# Altium PCB PCB.PcbDoc
Units mm, origin at the board's own origin, x right, y up, seen from the top; angles counter-clockwise.
Board outline 93.98 x 24.13 mm, 2 copper layers (Component Side, Bottom Layer), stack 0.325 mm thick; 70 components, 72 nets, 298 pads, 62 vias.
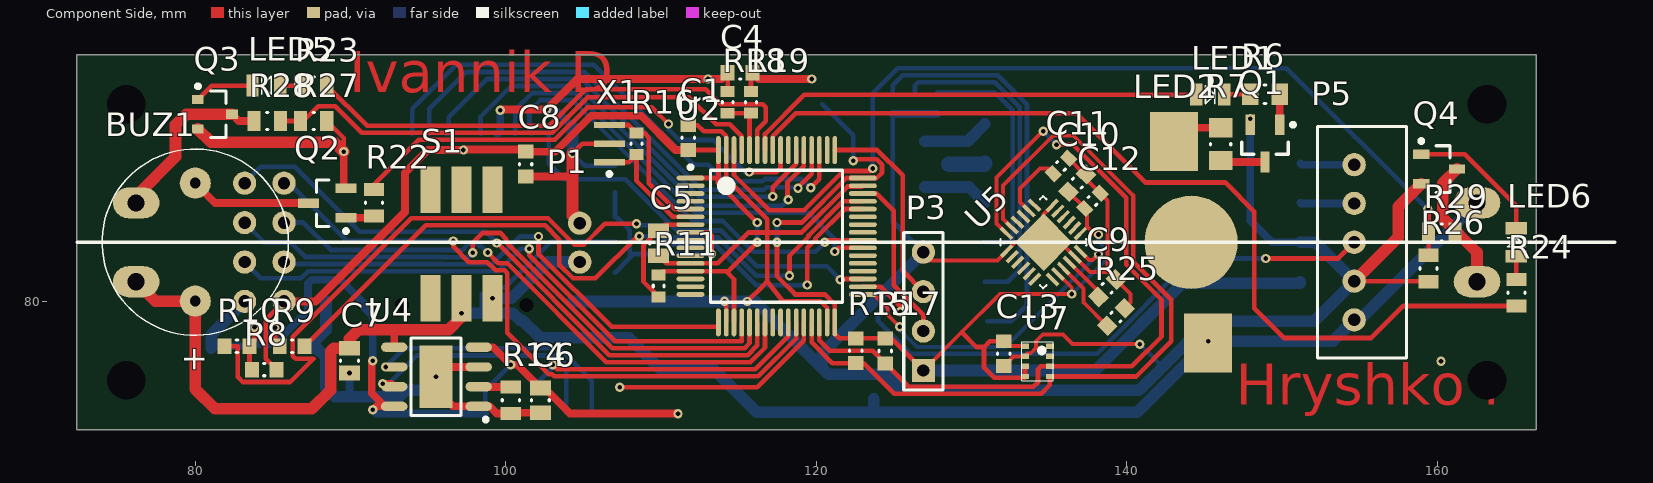
[diagram p0: Component Side view]
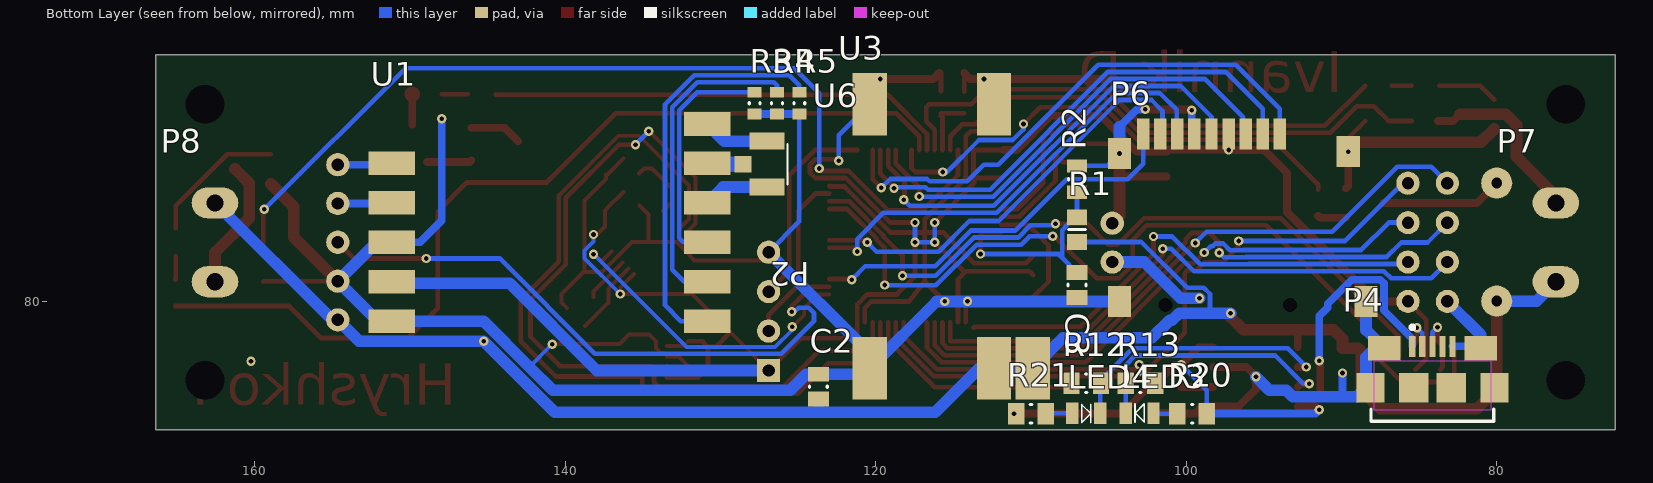
[diagram p1: Bottom Layer view, seen from below]

## Layer stack, top to bottom
Top Solder: solder mask 0.0102, Solder Resist, Dk 3.5
Component Side: signal copper 0.0356
Dielectric 1: core 0.254, FR-4, Dk 4.2
Bottom Layer: signal copper 0.0356
Solder Side: solder mask 0.0102, Solder Resist, Dk 3.5

## Board outline
72.39,71.755 72.39,95.885 166.37,95.885 166.37,71.755

## Design rules (kind name [scope] priority, off if disabled: settings)
Clearance [All] p1: gap=0.152 ignorepadtopadclearanceinfootprint=TRUE
ComponentClearance "under nrf24" [InComponent('P1') Or InComponent('U3') vs InComponent('U6')] p1: gap=0.254 collisioncheckmode=3 verticalgap=-999 showdistances=FALSE
ComponentClearance buzzer [InComponent('BUZ1') vs InComponent('U6') Or InComponent('P7')] p2: gap=0.254 collisioncheckmode=3 verticalgap=-999 showdistances=FALSE
ComponentClearance [All] p3: gap=0.5 collisioncheckmode=3 verticalgap=0 showdistances=TRUE
HoleSize [All] p1: absolutevalues=TRUE maxlimit=3 minlimit=0.3 maxpercent=80.000 minpercent=20.000
MinimumAnnularRing [All] p1: minimumring=0.076
MinimumSolderMaskSliver [All] p1 off: minsoldermaskwidth=0.254
PolygonConnect [All] p1: connectstyle=Relief reliefconductorwidth=0.254 reliefentries=4 polygonreliefangle="90 Angle" airgapwidth=0.254
RoutingVias [All] p1: holewidth=0.3 width=0.6 viastyle="Through Hole" minholewidth=0.3 minwidth=0.6 maxholewidth=0.6 maxwidth=1.27
ShortCircuit [All] p1: allowed=TRUE
SilkToSilkClearance [All] p1 off: silktosilkclearance=0.254
SilkToSolderMaskClearance [IsPad] p1 off: minsilkscreentomaskgap=0.254 clearancetoexposedcopper=TRUE
SolderMaskExpansion [All] p1: expansion=0.102
Width [All] p1: maxlimit=2 minlimit=0.254 preferedwidth=0.3
24 further rules are at their usual default settings.

## Components (designator, comment, footprint, x,y, rotation, side; value= is the part's Value field where it differs from the comment)
BUZ1 "Buzzer" BUZ12X7,6MM 80.01,87.67 r270 top locked
C1 "100nF" CAPC0603(1608)100_N 111.75,90.562 r270 top
C2 "10uF" CAPC0805(2012)100_L 123.705,74.523 r270 bottom value=200pF
C3 "100pF" CAPC0805(2012)100_L 107.046,81.072 r90 bottom value=200pF
C4 "4.7uF" CAPC0603(1608)100_N 115.1,94.727 r0 top
C5 "100pF" CAPC0805(2012)100_L 109.855,83.76 r90 top value=200pF
C6 "1uF" "CAP 0805 (2012) L" 102.235,73.643 r90 top
C7 "1uF" "CAP 0805 (2012) L" 89.941,76.2 r90 top
C8 "4.7uF" CAPC0603(1608)100_N 101.28,88.855 r90 top
C9 "100nF" CAPC0603(1608)100_N 138.743,80.86 r225 top
C10 "100nF" CAPC0603(1608)100_N 136.816,87.63 r45 top
C11 "2.2nF" CAPC0603(1608)100_L 135.76,88.739 r225 top
C12 "1uF" CAPC0603(1608)100_L 137.795,86.489 r225 top value=10nF
C13 "100nF" CAPC0603(1608)100_N 132.08,76.646 r90 top
LED1 "0805 LED" "0805 LED" 145.375,93.337 r0 top
LED2 "3W LED" "3W LED red" 144.145,83.82 r90 top locked
LED3 "0805 LED" "0805 LED" 103.007,72.814 r0 bottom
LED4 "0805 LED" "0805 LED" 106.446,72.798 r180 bottom
LED5 "0805 LED" "0805 LED" 84.6,93.92 r180 top
LED6 "0805 LED" "0805 LED" 165.1,83.82 r90 top
P1 "BATT" XH-2 106.275,87.05 r90 top locked
P2 "IPX" IPX 127,88.855 r270 bottom locked
P3 "PROG" PLS-4 126.908,75.565 r90 top locked
P4 "MicroUsb connector" "MicroUsb connector" 84.15,74.443 r180 bottom locked
P5 "XH2.54-5" XH2.54-5 154.65,83.82 r90 top locked
P6 "microSD connector" "Micro SD holder + card" 102.78,90.805 r180 bottom locked
P7 "para teminal" screw-con-2 76.2,81.28 r90 bottom locked
P8 "engine terminal" screw-con-2 162.56,86.36 r270 bottom locked
Q1 "MMBT2222A" INF-SOT23_M 148.905,90.19 r270 top
Q2 "MMBT2222A" INF-SOT23_M 88.516,86.344 r180 top
Q3 "MMBT2222A" INF-SOT23_L 81.28,92.062 r0 top
Q4 "MMBT2222A" INF-SOT23_N 160.12,88.539 r0 top
R1 "39K" 6-0805_L 107.046,84.638 r270 bottom value="39000.00 Ohm"
R2 "13K" RESC0805(2012)_L 107.046,87.889 r90 bottom value="13000.00 Ohm"
R3 "jumper" "RES 0603 (1608) L" 127.8,92.782 r270 bottom
R4 "jumper" "RES 0603 (1608) L" 126.365,92.782 r270 bottom
R5 "jumper" "RES 0603 (1608) L" 124.93,92.782 r270 bottom
R6 "47R" RESC0805(2012)_N 148.905,93.357 r0 top
R7 "5.6 Ohm" RESC0805(2012)_M 146.05,90.139 r90 top
R8 "1.5k" RESC0603(1608)_N 84.45,75.623 r0 top value="4700.00 Ohm"
R9 "22" RESC0603(1608)_N 86.25,77.118 r180 top value="4700.00 Ohm"
R10 "22" RESC0603(1608)_N 82.7,77.118 r0 top value="4700.00 Ohm"
R11 "100k" "RES 0603 (1608) L" 109.855,81.007 r270 top
R12 "1k" RESC0805(2012)_N 106.446,74.743 r0 bottom value=47R
R13 "1k" RESC0805(2012)_N 102.96,74.743 r180 bottom value=47R
R14 "1.2k" "RES 0805 (2012) L" 100.33,73.643 r90 top
R15 "4K7" RESC0603(1608)_N 122.555,76.835 r90 top value="4700.00 Ohm"
R16 "1M" "RES 0603 (1608) L" 108.428,90.17 r90 top
R17 "4K7" RESC0603(1608)_N 124.455,76.82 r90 top value="4700.00 Ohm"
R18 "100k" "RES 0603 (1608) L" 114.3,92.83 r270 top
R19 "boot0_jmp" "RES 0603 (1608) L" 115.797,92.837 r270 top
R20 "1k" RESC0805(2012)_N 99.63,72.785 r180 bottom value=47R
R21 "1k" RESC0805(2012)_N 110,72.785 r0 bottom value=47R
R22 "82R" RESC0805(2012)_L 91.514,86.362 r270 top
R23 "82R" RESC0805(2012)_L 87.63,93.912 r180 top
R24 "82R" RESC0805(2012)_L 165.1,80.572 r90 top
R25 "4K7" RESC0603(1608)_N 139.309,79.005 r45 top value="4700.00 Ohm"
R26 "10K" RESC0805(2012)_L 159.445,82.132 r90 top value="10000.00 Ohm"
R27 "10K" RESC0805(2012)_L 87.63,91.63 r180 top value="10000.00 Ohm"
R28 "1K" RESC0805(2012)_L 84.65,91.63 r0 top value="10000.00 Ohm"
R29 "1K" RESC0805(2012)_L 160.295,84.455 r180 top value="10000.00 Ohm"
S1 "DPDT" "DPDT  5.8mm SMD" 95.655,80.21 r90 top locked
U1 "TX5823" TX5823 141.025,83.82 r180 bottom locked
U2 "STM32F103RCT6" STM-LQFP64_N 117.455,84.21 r0 top locked
U3 "DC-DC" "DC-DC step up down S9" 112.395,93.71 r270 bottom locked
U4 "TP4056" "SOP-8 N pad" 95.515,75.158 r180 top locked
U5 "MPU-6050" QFN-24-4MM2 134.62,83.82 r45 top
U6 "NRF24L01+" "NRF24l01 ant" 83.185,87.63 r270 bottom locked
U7 "BMP280" "LGA-8 BMP280" 134.252,76.152 r0 top
X1 "8MHz" MURA-CSTCE_G_A-3_V 106.68,90.17 r90 top

## Footprints (in the part's own frame and the unit in brackets; to place one, negate y for a bottom-side part, rotate by r counter-clockwise, add the part's x,y. Pads: shape width x height; smd on the part's side, far side on the other; paste and mask are expansions set on the pad)
"3W LED red" [mm]
  rect 3.8x3.1 smd: A(-6.5,-1.1) K(6.5,1.1)
  round 6 smd: t-pad(0,0)
  body extent -7.09,-4 7.59,4, height 5.96
6-0805_L [mm] "Chip Resistor, Body 2.0x1.2mm, IPC High Density"
  rect 1x1.3 smd: 1(-0.8,0) 2(0.8,0)
  silkscreen extent 0,-0.55 0,0.55, body extent -1.07,-0.7 1.07,0.7, height 0.7
"0805 LED" [mm] "Chip Resistor, Body 2.0x1.2mm, IPC High Density"
  rect 0.8x1.4 smd: 1(-0.894,0.008) 2(0.903,0.008)
  silkscreen extent -0.3,-0.6 0.3,0.57, body extent -1.1,-0.73 1.1,0.72, height 1.4
BUZ12X7,6MM [mm]
  round 2 hole 0.7: 1(0.04,0) 2(7.64,0)
  silkscreen extent -2.16,-6 9.84,6, body extent -2.16,-6 9.84,6, height 9.51
"CAP 0805 (2012) L" [mm] "Chip Capacitor, Body 2.0x1.2mm, Height 0.75mm, IPC High Density"
  rect 0.95x1.35 smd: 1(-0.8,0) 2(0.8,0)
  silkscreen extent -0.05,-0.57 0.05,0.57, body extent -1.05,-0.67 1.05,0.68, height 0.95
CAPC0603(1608)100_L [mm] "Chip Capacitor, Body 1.6x0.8mm, Height 1.0mm, IPC High Density"
  rect 0.7x0.9 smd: 1(-0.7,0) 2(0.7,0)
  silkscreen extent -0.05,-0.35 0.05,0.35, body extent -0.88,-0.47 0.88,0.48, height 1
CAPC0603(1608)100_N [mm] "Chip Capacitor, Body 1.6x0.8mm, Height 1.0mm, IPC Medium Density"
  rect 0.9x1 smd: 1(-0.8,0) 2(0.8,0)
  silkscreen extent -0.05,-0.4 0.05,0.4, body extent -0.88,-0.48 0.88,0.47, height 1
CAPC0805(2012)100_L [mm] "Chip Capacitor, Body 2.0x1.2mm, Height 1.0mm, IPC High Density"
  rect 0.95x1.35 smd: 1(-0.8,0) 2(0.8,0)
  silkscreen extent -0.05,-0.58 0.05,0.58, body extent -1.1,-0.72 1.1,0.72, height 1
"DC-DC step up down S9" [mm]
  rect 4x2.2 smd: 1(1,0) 2(1,-8) 3(18,-8) 4(18,0) 5(18,2.5)
  body extent 0,-10.03 19,3.97, height 4.01
"DPDT  5.8mm SMD" [mm]
  rect 3x1.3 smd: 1(0,0.5) 2(0,-1.5) 3(0,-3.5) 4(7,-3.5) 5(7,-1.5) 6(7,0.5)
  body extent -0.85,-4.35 7.85,1.35, height 10.31
INF-SOT23_L [mm] "SOT23, 3-Leads, Body 2.9x1.3 mm, Pitch 0.95 mm, IPC High Density"
  rect 0.75x0.6 smd: 1(-1.1,0.95) 2(-1.1,-0.95) 3(1.1,0)
  silkscreen extent -1.22,-1.5 0.7,1.92, body extent -0.7,-1.5 0.7,1.5, height 1.1
INF-SOT23_M [mm] "SOT23, 3-Leads, Body 2.9x1.3 mm, Pitch 0.95 mm, IPC Low Density"
  rect 1.35x0.6 smd: 1(-1.2,0.95) 2(-1.2,-0.95) 3(1.2,0)
  silkscreen extent -1.32,-1.5 0.7,1.93, body extent -0.7,-1.5 0.7,1.5, height 1.1
INF-SOT23_N [mm] "SOT23, 3-Leads, Body 2.9x1.3 mm, Pitch 0.95 mm, IPC Medium Density"
  rect 1.05x0.6 smd: 1(-1.15,0.95) 2(-1.15,-0.95) 3(1.15,0)
  silkscreen extent -1.27,-1.5 0.7,1.92, body extent -0.7,-1.5 0.7,1.5, height 1.1
IPX [mm]
  rect 1.1x2.25 smd: 1(-1.475,0) 2(1.475,0)
  rect 1.05x1.1 smd: 3(0,-1.55)
  silkscreen extent -1.3,1.3 1.3,1.3, body extent -1.5,-1.55 1.5,1.3, height 1.29
"LGA-8 BMP280" [mm]
  rect 0.5x0.35 smd paste-25.4 mask-25.4: 1(0.8,0.975) 2(0.8,0.325) 3(0.8,-0.325) 4(0.8,-0.975) 5(-0.8,-0.975) 6(-0.8,-0.325) 7(-0.8,0.325) 8(-0.8,0.975)
  silkscreen extent -1,-1.25 1,1.25, body extent -1,-1.25 1,1.25, height 1
"Micro SD holder + card" [mm]
  rect 1.5x2 smd: 0(-1.524,-10.795) 0(-1.524,-1.27) 0(13.208,-1.143) 0(14.351,-10.795)
  rect 0.8x2 smd: 1(8.8,0) 2(7.7,0) 3(6.6,0) 4(5.5,0) 5(4.4,0) 6(3.3,0) 7(2.2,0) 8(1.1,0) 9(0,0)
  round 0 hole 0.9 unplated: ""(1.45,-11.025) ""(9.45,-11.025)
  body extent -1.65,-15.03 14.66,0.18, height 1.91
"MicroUsb connector" [mm] "SMT, 5-Leads, Body 7.9x5mm, Pitch 0.65mm"
  rect 0.4x1.35 smd: 1(-1.3,2.675) 2(-0.65,2.675) 3(0,2.675) 4(0.65,2.675) 5(1.3,2.675)
  rect 2.1x1.6 smd: 6(3.1,2.55) 7(-3.1,2.55)
  rect 1.8x1.9 smd: 8(-4,0) 9(4,0)
  rect 1.9x1.9 smd: 10(1.2,0) 11(-1.2,0)
  Component Side keep-out region: -3.75,1.75 3.75,1.75 3.75,-1.45 -3.75,-1.45
  silkscreen extent -3.95,-2.15 3.95,4.02, body extent -3.9,-2.33 3.9,2.67, height 2.68
MURA-CSTCE_G_A-3_V [mm] "SMD, 3-Leads, Body 3.2x1.3mm, Pitch 1.2mm"
  rect 0.4x2 smd: 1(-1.2,0) 2(0,0) 3(1.2,0)
  silkscreen extent -2.07,-0.13 -1.83,0.12, body extent -1.6,-0.65 1.6,0.65, height 0.7
"NRF24l01 ant" [mm]
  round 1.5 hole 0.8: 1(7.62,0) 2(7.62,-2.54) 3(5.08,0) 4(5.08,-2.54) 5(2.54,0) 6(2.54,-2.54) 7(0,0) 8(0,-2.54)
  body extent -4.13,-41.13 11.83,2.13, height 4.5
PLS-4 [mm]
  rect 1.5x1.5 hole 0.8: 1(0,0)
  round 1.5 hole 0.8: 2(2.54,0) 3(5.08,0) 4(7.62,0)
  silkscreen extent -1.27,-1.27 8.89,1.27, body extent -1.27,-1.27 8.89,1.27, height 8.44
QFN-24-4MM2 [mil]
  rect 40x10 smd paste-1000 mask-1000: 1(-81.35,49.48) 2(-81.35,29.51) 3(-81.35,9.74) 4(-81.35,-11.32) 5(-81.35,-31.18) 6(-81.35,-51.05) 13(82.13,-51.05) 14(82.13,-31.18) 15(82.13,-11.32) 16(82.13,9.74) 17(82.13,29.51) 18(82.13,49.48)
  rect 10x40 smd paste-1000 mask-1000: 7(-49.87,-83.53) 8(-30,-83.53) 9(-10.14,-83.53) 10(10.92,-83.53) 11(30.69,-83.53) 12(50.66,-83.53) 19(50.66,81.95) 20(30.69,81.95) 21(10.92,81.95) 22(-10.14,81.95) 23(-30,81.95) 24(-49.87,81.95)
  rect 103x103 smd mask-1000: 18(0.79,-0.39)
  silkscreen extent -83,-83 83,83, body extent -80,-80 80,80, height 35
"RES 0603 (1608) L" [mm] "Chip Resistor, Body 1.6x0.8mm, IPC High Density"
  rect 0.7x0.9 smd: 1(-0.7,0) 2(0.7,0)
  silkscreen extent -0.05,-0.35 0.05,0.35, body extent -0.8,-0.4 0.8,0.4, height 0.45
"RES 0805 (2012) L" [mm] "Chip Resistor, Body 2.0x1.3mm, IPC High Density"
  rect 0.85x1.3 smd: 1(-0.85,0) 2(0.85,0)
  silkscreen extent -0.05,-0.55 0.05,0.55, body extent -1,-0.63 1,0.62, height 0.5
RESC0603(1608)_N [mm] "Chip Resistor, Body 1.6x0.8mm, IPC Medium Density"
  rect 0.9x1 smd: 1(-0.8,0) 2(0.8,0)
  silkscreen extent -0.05,-0.4 0.05,0.4, body extent -0.85,-0.47 0.85,0.47, height 0.6
RESC0805(2012)_L [mm] "Chip Resistor, Body 2.0x1.3mm, IPC High Density"
  rect 0.85x1.3 smd: 1(-0.85,0) 2(0.85,0)
  silkscreen extent -0.05,-0.55 0.05,0.55, body extent -1.1,-0.67 1.1,0.68, height 0.7
RESC0805(2012)_M [mm] "Chip Resistor, Body 2.0x1.3mm, IPC Low Density"
  rect 1.25x1.5 smd: 1(-1.05,0) 2(1.05,0)
  silkscreen extent -0.05,-0.65 0.05,0.65, body extent -1.1,-0.67 1.1,0.67, height 0.7
RESC0805(2012)_N [mm] "Chip Resistor, Body 2.0x1.3mm, IPC Medium Density"
  rect 1.05x1.4 smd: 1(-0.95,0) 2(0.95,0)
  silkscreen extent -0.05,-0.6 0.05,0.6, body extent -1.1,-0.67 1.1,0.68, height 0.7
screw-con-2 [mm] "2.54"
  oval 2x3 hole 1.1: 1(0,0) 2(5.08,0)
  body extent -2.46,-3.74 7.54,4.06, height 10.2
"SOP-8 N pad" [mm] "TSOP, 8-Leads, Body 4,90x3,95mm, Pitch 1,27mm, Thermal Pad 4,00x2,10mm, IPC Medium Density"
  oval 1.7x0.6 smd: 1(-2.746,1.905) 2(-2.746,0.635) 3(-2.746,-0.635) 4(-2.746,-1.905) 5(2.692,-1.905) 6(2.692,-0.635) 7(2.692,0.635) 8(2.692,1.905)
  rect 2.1x4 smd: PAD(0,0)
  silkscreen extent -3.33,-2.5 1.6,2.88, body extent -3.02,-2.51 3.02,2.51, height 1.6
STM-LQFP64_N [mm] "Thin QFP, 64-Leads, Body 10x10mm, Pitch 0.5mm, IPC Medium Density"
  oval 1.8x0.3 smd: 1(-5.55,3.75) 2(-5.55,3.25) 3(-5.55,2.75) 4(-5.55,2.25) 5(-5.55,1.75) 6(-5.55,1.25) 7(-5.55,0.75) 8(-5.55,0.25) 9(-5.55,-0.25) 10(-5.55,-0.75) 11(-5.55,-1.25) 12(-5.55,-1.75) 13(-5.55,-2.25) 14(-5.55,-2.75) 15(-5.55,-3.25) 16(-5.55,-3.75) 33(5.55,-3.75) 34(5.55,-3.25) 35(5.55,-2.75) 36(5.55,-2.25) 37(5.55,-1.75) 38(5.55,-1.25) 39(5.55,-0.75) 40(5.55,-0.25) 41(5.55,0.25) 42(5.55,0.75) 43(5.55,1.25) 44(5.55,1.75) 45(5.55,2.25) 46(5.55,2.75) 47(5.55,3.25) 48(5.55,3.75)
  oval 0.3x1.8 smd: 17(-3.75,-5.55) 18(-3.25,-5.55) 19(-2.75,-5.55) 20(-2.25,-5.55) 21(-1.75,-5.55) 22(-1.25,-5.55) 23(-0.75,-5.55) 24(-0.25,-5.55) 25(0.25,-5.55) 26(0.75,-5.55) 27(1.25,-5.55) 28(1.75,-5.55) 29(2.25,-5.55) 30(2.75,-5.55) 31(3.25,-5.55) 32(3.75,-5.55) 49(3.75,5.55) 50(3.25,5.55) 51(2.75,5.55) 52(2.25,5.55) 53(1.75,5.55) 54(1.25,5.55) 55(0.75,5.55) 56(0.25,5.55) 57(-0.25,5.55) 58(-0.75,5.55) 59(-1.25,5.55) 60(-1.75,5.55) 61(-2.25,5.55) 62(-2.75,5.55) 63(-3.25,5.55) 64(-3.75,5.55)
  silkscreen extent -5.67,-4.25 4.25,4.57, body extent -5,-5 5,5, height 1.6
TX5823 [mm] "FPV video transmitter module 200mW"
  rect 3x1.524 smd: 1(-10.16,5.08) 2(-10.16,2.54) 3(-10.16,0) 4(-10.16,-2.54) 5(-10.16,-5.08) 6(10.16,-5.08) 7(10.16,-2.54) 8(10.16,0) 9(10.16,2.54) 10(10.16,5.08) 11(10.16,7.62)
  body extent -11,-9.68 11,9.32, height 3.01
XH2.54-5 [mm]
  round 1.5 hole 0.8: 1(-5,0) 2(-2.5,0) 3(0,0) 4(2.5,0) 5(5,0)
  silkscreen extent -7.45,-3.38 7.45,2.38, body extent -7.45,-3.38 7.45,2.38, height 7
XH-2 [mm]
  round 1.5 hole 0.8: 1(-4.5,1.5) 2(-2,1.5)
  body extent -6.95,-1.87 0.45,3.88, height 7

## Part data
BUZ1: "Active buzzer 5v"
C1 C9 C10 C13: library part CMP-1035-02585-1, "CAP 100nF 16V ±20% 0603 (1608 Metric) Thickness 1mm SMD", Case-EIA=0603, Case-Metric=1608, Rated Voltage="16 V", Tolerance=A±20%, Max Thickness="1 mm", Technology=SMT
C2 C3 C5: library part CMP-1036-02260-1, "CAP 200pF 16V ±10% 0805 (2012 Metric) Thickness 1mm SMD", Case-EIA=0805, Case-Metric=2012, Rated Voltage="16 V", Tolerance=A±10%, Max Thickness="1 mm", Technology=SMT
C4 C8: library part CMP-1035-02789-1, "CAP 4.7uF 16V ±20% 0603 (1608 Metric) Thickness 1mm SMD", Case-EIA=0603, Case-Metric=1608, Rated Voltage="16 V", Tolerance=A±20%, Max Thickness="1 mm", Technology=SMT
C6 C7: library part "Cap Cer 0805 (2012)", "SMD Capacitor Ceramic", Case-EIA=0805, Case-Metric=2012, Technology=SMT, Type=Ceramic
C11: library part CMP-1035-02030-1, "CAP 2.2nF 16V ±20% 0603 (1608 Metric) Thickness 1mm SMD", Case-EIA=0603, Case-Metric=1608, Rated Voltage="16 V", Tolerance=A±20%, Max Thickness="1 mm", Technology=SMT
C12: library part CMP-1035-02312-1, "CAP 10nF 16V ±20% 0603 (1608 Metric) Thickness 1mm SMD", Case-EIA=0603, Case-Metric=1608, Rated Voltage="16 V", Tolerance=A±20%, Max Thickness="1 mm", Technology=SMT
LED1 LED3 LED4 LED5 LED6: "0805", LatestRevisionDate=08-Jul-2005, LatestRevisionNote="Mech Layer 1 removed.", PackageDescription="LED; 2 Leads", PackageReference=LED-0, Published=8-Jun-2000, Publisher="Altium Limited"
LED2: "3W or 1W led without PCB star"
P1: library part XH-2, "XH 2-pin, 2.4mm pitch", LatestRevisionDate=17-Jul-2002, LatestRevisionNote="Re-released for DXP Platform.", Publisher="Altium Limited"
P3: library part PLS-4, "Single row pins"
P6: library part microSD, "microSD holder", LatestRevisionDate=17-Jul-2002, LatestRevisionNote="Re-released for DXP Platform.", Publisher="Altium Limited"
P7 P8: library part screw-con-2, "screw con 2-pin, 5.08mm pitch", LatestRevisionDate=17-Jul-2002, LatestRevisionNote="Re-released for DXP Platform.", Publisher="Altium Limited"
Q1 Q2 Q3 Q4: library part CMP-1178-00009-1, "NPN Silicon Switching Transistor, 40 V VCEO, 600 mA IC, SOT23, Reel, Green", Manufacturer=Infineon, ComponentLink1Description="Manufacturer URL", ComponentLink1URL=http://www.infineon.com/, ComponentLink2Description=Datasheet, ComponentLink2URL=http://www.infineon.com/dgdl/smbt2222a_mmbt2222a.pdf?folderId=db3a30431441fb5d011445fab851018e&fileId=db3a30431441fb5d011445fbaff0018f, ComponentLink3Description="Package Specification", ComponentLink3URL=http://www.infineon.com/dgdl/SOT23-Package_Overview.pdf?folderId=db3a30431936bc4b0119532290053c66&fileId=db3a30431936bc4b0119533468123c85, Green=TRUE, IC="150 mA", IC (max)="600 mA", ICBO (max)="10 nA", Mounting Technology="Surface Mount", PackageDescription="3-Pin Small Outline Transistor Package, 1.3 x 2.9 mm Body, 0.95 mm Pitch", PackageReference=SOT23, PackageVersion=Apr-08, Packing=Reel, PartNumber=MMBT2222A, Polarity=NPN, VCBO (max)="75 V", VCE="10 V", VCE (max)="10 V", VCEO (max)="40 V", VEBO (max)="6 V"
R1: library part CMP-1014-00112-1, "39K 0.25W 5% 1206 (3216 Metric)  SMD", Case-EIA=1206, Case-Metric=3216, Power="0.25 W", Tolerance="5 %", Technology=SMT
R2: library part CMP-1013-00101-1, "13K 0.125W 5% 0805 (2012 Metric)  SMD", Case-EIA=0805, Case-Metric=2012, Power="0.125 W", Tolerance="5 %", Technology=SMT
R3 R4 R5 R11 R16 R18 R19: library part "Res 0603", Case-EIA=0603, Case-Metric=1608, Power=0.1W, Technology=SMT
R6 R12 R13 R20 R21: library part CMP-1013-00060-1, "270R 0.125W 5% 0805 (2012 Metric)  SMD", Case-EIA=0805, Case-Metric=2012, Power="0.125 W", Tolerance="5 %", Technology=SMT
R7: library part CMP-1013-00050-1, "100R 0.125W 5% 0805 (2012 Metric)  SMD", Case-EIA=0805, Case-Metric=2012, Power="0.125 W", Tolerance="5 %", Technology=SMT
R8 R9 R10 R15 R17 R25: library part CMP-1012-00090-1, "4K7 0.1W 5% 0603 (1608 Metric)  SMD", Case-EIA=0603, Case-Metric=1608, Power="0.1 W", Tolerance="5 %", Technology=SMT
R14: library part "Res 0805", Case-EIA=0805, Case-Metric=2012, Power=0.125W, Technology=SMT
R22 R23 R24: library part CMP-1013-00011-1, "2R4 0.125W 5% 0805 (2012 Metric)  SMD", Case-EIA=0805, Case-Metric=2012, Power="0.125 W", Tolerance="5 %", Technology=SMT
R26 R27 R28 R29: library part CMP-1013-00098-1, "10K 0.125W 5% 0805 (2012 Metric)  SMD", Case-EIA=0805, Case-Metric=2012, Power="0.125 W", Tolerance="5 %", Technology=SMT
S1: library part "Double switch", "Different footprints", LatestRevisionDate=17-Jul-2002, LatestRevisionNote="Re-released for DXP Platform.", PackageDescription="Switch; 6 Leads", PackageReference=DPDT-6, Published=24-Mar-1999, Publisher="Altium Limited"
U1: "FPV video transmitter 200mW"
U2: library part CMP-0237-00009-4, "ARM Cortex-M3 32-bit MCU, 256 KB Flash, 48 KB Internal RAM, 51 I/Os, 64-pin LQFP, -40 to 85 degC, Tray", I/Os (High Current)=51, Operating Frequency(F) (Processor speed) (MHz)=72, Supply Voltage(Vcc) min (V)=2, A/D Converter="3x12-bit (16 Channel)", ComponentLink1Description="Manufacturer URL", ComponentLink1URL=http://www.st.com/web/en/home.html, ComponentLink2Description=Datasheet, ComponentLink2URL=http://www.st.com/st-web-ui/static/active/en/resource/technical/document/datasheet/CD00191185.pdf, ComponentLink3Description="Package Specification", ComponentLink3URL=http://www.st.com/st-web-ui/static/active/en/resource/technical/document/datasheet/DM00037051.pdf, Core="ARM Cortex-M3", D/A Converter="2x12-bit (2 Channel)", DatasheetVersion="Rev. 8", FLASH Size (Prog) (kB)=256, Internal RAM Size (kB)=48, Mounting Technology="Surface Mount", PackageDescription="64-Pin Low Profile Quad Flat Package, 10 x 10 mm Body, 0.5 mm Pitch", PackageReference=LQFP64, PackageVersion="Rev. 4, 06/2013", Packing=Tray, PartNumber=STM32F103RCT6
U3: library part "DC-DC step up down S9"
U4: "Li battery charger IC"
U6: "Wirless module 2.4GHz"
X1: library part CMP-2100-03620-1, "Ceramic Resonator, 8 MHz, +/- 0.5%, -20 to 80 degC, 3-Pin SMD, RoHS, Tape and Reel", Capacitance=33pF, Case/Package=Ceramic, Frequency Stability=0.2%, Frequency Tolerance=0.5%, Manufacturer=Murata, Max Operating Temperature=80degC, Min Operating Temperature=-20degC, Package Description="3-Pin Surface Mount Device, Body 3.2 x 1.3 mm, Pitch 1.2 mm", Package Quantity=1, Package Reference=CSTCE_G_A-3, Composition=Ceramic, Contact Plating=Gold, Datasheet URL=http://www.murata.com/~/media/webrenewal/support/library/catalog/products/timingdevice/ceralock/p16e.ashx, Datasheet Version=42339.0, Frequency=8MHz, Height=0.031inch, Lead Free=LeadFree, Length=0.126inch, Load Capacitance=33pF, Manufacturer URL=http://www.murata.com/, Mount=SurfaceMount, Number of Pins=3, Packaging=TapeandReel, REACH SVHC=NoSVHC, RoHSCompliant=True, Self Resonant Frequency=8MHz, Termination=SMD/SMT, Tolerance=0.5%, Width=0.051inch

## Free pads (board coordinates)
  round 0 hole 2.5: ""(75.565,74.93) ""(75.565,92.71) ""(163.195,74.93) ""(163.195,92.71)

## Via types
v1: diameter 0.6, hole 0.3, Component Side to Bottom Layer, 62 vias

## Nets (pads, with @x,y where several pads share a name; then routed paths per layer and width w, separated by ;. In a path a pad name is that pad's centre, name@x,y a point inside that pad or via, vN(x,y) a via of type N, cw(c..) or ccw(c..) an arc to the next point about the centre after c; other vN are vias at no path point)
3.3V: C1.2 C4.2 C8.2 C10.1 C12.2 C13.2 P3.1 P6.4 R8.2 R11.1 R15.2 R17.2 R19.1 U1.4 U2.1 U2.13 U2.19 U2.32 U2.48 U2.64 U3.2 U5.8 U5.13 U6.2 U7.5 U7.6 U7.8 | length 156.4
  Component Side w0.254: P3.1 129.369,78.027 131.831,80.489 v1(136.459,80.489) ; C13.2 132.399,77.127 U7.8 ; U5.8 136.459,80.903 v1@136.459,80.721 ; C10.1 137.3,86.014 C12.2 137.442,85.852 137.442,84.808 137.48,84.808 137.968,84.32 v1(138.178,84.32)
  Component Side w0.3: R8.2 84.548,76.325 84.548,78.833 U6.2 ; R11.1 110.108,81.96 U2.13 114.187,81.96 114.266,81.881 ; C1.2 111.752,89.76 U2.64 113.705,87.985 113.68,87.96 ; U2.1 113.68,87.96 ; U2.19 114.705,81.442 114.266,81.881 ; R19.1 115.797,94.625 C4.2 ; v1(116.205,83.82) 114.266,81.881 ; v1(116.205,85.09) 113.68,87.615 113.68,87.96 ; v1(117.475,83.82) 117.475,81.624 118.639,80.46 120.56,80.46 121.205,79.815 U2.32 121.205,77.924 121.494,77.635 R15.2 124.838,77.635 P3.1 ; v1(117.475,85.09) 119.059,85.09 121.928,87.96 U2.48 123.896,87.96 124.243,88.307 124.243,88.82 123.89,89.172 122.505,89.172 v1(122.395,89.062) ; 129.369,78.027 130.321,77.076 130.81,77.076 ; C13.2 131.181,77.446 130.81,77.076 ; U7.6 U7.5 133.452,75.094 131.455,75.094 130.81,75.739 130.81,77.076
  Component Side w0.5: U6.2 87.753,80.01 93.515,85.772 93.515,88.289 94.986,89.76 v1(97.28,89.76) 97.315,89.794 101.141,89.794 C8.2 103.196,89.655 105.513,91.972 108.73,91.972 110.941,89.762 C1.2 ; C4.2 116.287,94.34 v1(119.705,94.34)
  Bottom Layer w0.254: v1(136.459,80.489) 138.757,82.787 138.757,83.299 138.178,83.879 v1(138.178,84.32)
  Bottom Layer w0.3: v1(116.205,85.09) v1(116.205,83.82) v1(117.475,83.82) v1(117.475,85.09) ; U3.2 122.395,90.71 v1(122.395,89.062)
  Bottom Layer w0.75: P3.1 137.972,75.565 143.587,81.181 151.185,81.181 U1.4
adc: C3.2 R1.1 R2.1 U2.8 | length 14
  Component Side w0.3: U2.8 113.079,84.46 113.257,84.282 v1(113.257,83.062)
  Bottom Layer w0.3: C3.2 107.998,82.824 ; R2.1 R1.1 107.165,85.438 107.826,84.777 107.826,84.755 107.998,84.583 107.998,82.824 ; v1(113.257,83.062) 108.236,83.062 107.998,82.824
BATT+: BUZ1.2 C2.2 C7.2 LED2.A P5.1 P7.1 P8.1 R1.2 S1.2 U3.4 U3.5 U4.5 | length 123.3
  Component Side w0.5: U4.5 92.823,78.183
  Component Side w0.75: P7.1 77.45,80.03 BUZ1.2 80.01,74.363 81.279,73.093 87.523,73.093 88.739,74.309 88.739,76.799 88.94,77 C7.2 89.941,77.6 90.524,78.183 92.823,78.183 96.332,78.183 97.155,79.005 v1(97.155,79.26)
  Bottom Layer w0.3: 98.478,79.26 98.478,80.491 98.874,80.887 99.943,80.887 102.894,83.838 R1.2
  Bottom Layer w0.75: P7.1 77.45,80.03 BUZ1.2 ; v1(97.155,79.26) 98.478,79.26 100.468,79.26 100.925,78.803 101.076,78.803 102.217,77.662 107.943,77.662 U3.5 U3.4 113.341,75.71 116.178,72.873 123.705,72.873 ; C2.2 123.705,72.873 ; P8.1 155.02,78.82 P5.1 153.281,77.451 v1(145.245,77.451) 140.667,72.873 123.705,72.873
buzzer_tr: R22.1 U2.56 | length 31.8
  Component Side w0.3: R22.1 91.514,87.519 94.41,90.415 103.175,90.415 105.285,92.525 109.405,92.525 v1(110.49,91.44) ; v1(115.697,88.344) 117.444,88.344 117.705,88.605 U2.56
  Bottom Layer w0.3: v1(110.49,91.44) 110.49,91.087 111.17,90.408 113.356,90.408 115.419,88.344 v1(115.697,88.344)
camAudio: P5.4 U1.2 | length 3.5
  Bottom Layer w0.5: U1.2 151.225,86.32 P5.4
camBtn: P5.3 U2.34 | length 40
  Component Side w0.3: U2.34 124.16,80.96 125.405,79.715 v1(125.405,79.341) ; v1(148.955,82.781) 153.611,82.781 P5.3
  Bottom Layer w0.3: v1(125.405,79.341) 125.236,79.341 124.969,79.608 124.33,79.608 123.978,79.255 123.978,78.756 126.087,76.646 138.095,76.646 144.229,82.781 v1(148.955,82.781)
camVideo: P5.5 U1.1 | length 3.5
  Bottom Layer w0.5: U1.1 151.265,88.82 P5.5
card_exists: P6.9 U2.35 | length 25.3
  Component Side w0.3: v1(121.553,81.406) 121.607,81.46 U2.35
  Bottom Layer w0.3: P6.9 102.78,88.881 103.772,87.889 107.699,87.889 111.012,84.576 113.875,84.576 116.177,82.274 120.698,82.274 121.553,81.419 v1(121.553,81.406)
CARDCS: U2.16
CHARGE_VCC: C6.2 P4.1 R20.2 R21.2 U4.4 U4.8 | length 43.6
  Component Side w0.5: v1(91.44,73.025) 91.668,73.253 U4.8@92.21,73.253 ; v1(91.44,76.2) 91.373,76.133 91.373,74.09 U4.8@92.21,73.253 ; U4.8 U4.8@92.21,73.253 ; U4.4 99.197,77.063 v1(100.33,75.93) 100.748,75.93 C6.2 102.492,74.443 104.15,72.785 v1(111.1,72.785)
  Bottom Layer w0.3: R20.2 98.68,74.28 v1(100.33,75.93)
  Bottom Layer w0.5: P4.1 85.45,77.613 87.277,79.439 87.277,81.177 87.512,81.412 89.346,81.412 90.89,79.868 90.89,79.619 91.44,79.069 v1(91.44,76.2) ; v1(91.44,73.025) 91.68,72.785 R20.2
CHECKE: R26.2 R29.2 U2.62 | length 60.6
  Component Side w0.3: U2.62 114.705,88.152 116.97,85.887 119.216,85.887 121.741,88.412 123.483,88.412 v1(123.64,88.57) ; v1(159.385,85.939) 159.445,85.879 R29.2 R26.2
  Bottom Layer w0.3: v1(123.64,88.57) 123.64,93.42 125.26,95.039 150.285,95.039 v1(159.385,85.939)
CHECKP: R27.2 R28.2 U2.61 | length 33.7
  Component Side w0.3: R28.2 86.977,91.63 87.93,92.582 89.03,92.582 90.745,90.868 102.988,90.868 105.282,93.162 111.802,93.162 113.55,91.415 114.44,91.415 115.205,90.65 U2.61
chg_cpt: LED4.2 R12.1 U4.6 | length 17.3
  Component Side w0.5: v1(92.28,75.793) U4.6
  Bottom Layer w0.3: v1(92.28,75.793) 93.472,76.985 103.465,76.985 105.543,74.907 LED4.2
chging: LED3.2 R13.1 U4.7 | length 16.8
  Component Side w0.5: v1(92.075,74.71) 92.636,74.71 U4.7
  Bottom Layer w0.3: v1(92.075,74.71) 92.467,74.71 94.29,76.532 103.277,76.532 103.91,75.9 LED3.2
ENGINE: P8.2 Q4.3 R29.1 | length 8.6
  Component Side w0.75: Q4.3 160.345,87.614 160.345,85.376 162.56,83.161 P8.2
engine_tr: R24.1 U2.57 | length 59.9
  Component Side w0.3: U2.57 117.205,90.65 118.685,92.13 136.744,92.13 141.201,87.673 146.331,87.673 148.205,85.799 148.205,79.572 150.119,77.658 155.747,77.658 157.811,79.722 R24.1
GND: C1.1 C2.1 C3.1 C4.1 C5.1 C6.1 C7.1 C8.1 C9.1 C10.2 C11.1 C12.1 C13.1 P1.2 P3.4 P4.5 P4.6 P4.7 P4.8 P4.9 P4.10 P4.11 P5.2 P6.0 P6.6 Q1.2 Q2.2 Q3.2 Q4.2 R2.2 R3.2 R4.2 R5.2 R14.1 R18.1 R25.2 R26.1 R27.1 U1.3 U1.5 U2.12 U2.18 U2.31 U2.47 U2.63 U3.1 U3.3 U4.1 U4.3 U4.PAD U5.1 U5.11 U5.18 U6.1 U7.7 X1.2 | length 266.6
  Component Side w0.254: P3.4 127.435,82.657 131.68,82.657 U5.1 132.85,83.827 U5.18@134.641,83.827 ; C13.1 132.711,76.477 U7.7 133.452,76.527 133.598,76.673 133.818,76.673 134.168,77.023 134.168,77.446 134.591,77.868 135.896,77.868 136.504,77.261 v1(140.838,77.261) ; U5.18@135.207,86.184 134.641,85.618 U5.18@134.641,83.827 ; C11.1 137.293,88.196 C10.2 137.381,87.893 C12.1 138.757,86.517 138.757,81.977 138.82,81.915 ; R25.2 140.246,79.942 140.246,80.489 C9.1 138.82,81.915 ; U5.18@134.641,83.827 135.715,83.827 U5.11 137.628,81.915 138.82,81.915
  Component Side w0.3: R27.1 89.572,90.538 v1(89.572,89.662) ; v1(104.304,89.535) 104.939,90.17 X1.2 ; C5.1 110.355,82.46 U2.12 113.664,82.46 115.66,84.455 116.84,84.455 ; C1.1 112.357,91.362 112.756,90.962 113.892,90.962 114.205,90.65 U2.63 114.205,87.942 116.84,85.307 116.84,84.455 ; v1(114.091,80.03) 114.205,79.916 U2.18 ; R18.1 C4.1 ; v1(115.57,80.012) 116.557,80.999 116.84,81.329 ; U2.31 120.705,79.587 120.285,80.007 117.854,80.007 116.84,81.329 ; U2.47 122.957,87.412 122.02,87.412 119.063,84.455 116.84,84.455 ; P5.2 159.407,81.32 R26.1 ; 116.84,81.329 116.84,84.455
  Component Side w0.5: v1(89.572,89.662) 89.572,87.438 Q2.2 ; U4.3 96.15,75.793 v1(95.515,75.158) 95.515,74.353 96.615,73.253 U4.1 98.973,73.253 99.433,72.793 R14.1 100.38,72.843 C6.1 ; v1(99.653,92.332) 99.7,92.38 v1(102.641,92.38) 104.601,94.34 v1(113.03,94.34) 113.913,94.34 C4.1 ; C8.1 104.288,88.055 104.304,88.039
  Component Side w0.75: Q3.2 81.032,90.26 88.974,90.26 v1(89.572,89.662) ; v1(104.304,89.535) 104.304,88.039 104.304,85.521 P1.2 ; P5.2 157.48,84.15 157.48,86.099 Q4.2
  Bottom Layer w0.254: v1(140.838,77.261) 142.309,75.791
  Bottom Layer w0.3: v1(104.304,89.535) 105.1,88.739 R2.2 ; R5.2 124.93,85.163 P3.4
  Bottom Layer w0.5: P4.6@81.468,77.118 P4.5 ; 89.941,73.883 v1(89.941,75.4) ; P6.6 99.653,90.978 v1(99.653,92.332) ; v1(102.641,92.38) 103.174,92.38 104.304,91.25 ; R5.2 R3.2 ; v1(147.955,91.77) 147.955,85.225 149.36,83.82 U1.3
  Bottom Layer w0.75: P4.6 81.05,77.875 U6.1 ; P6.0@88.429,80.01 88.429,78.172 P4.7 87.846,76.993 88.427,76.412 88.427,74.443 88.988,73.883 89.941,73.883 93.146,73.883 93.559,74.295 94.652,74.295 v1(95.515,75.158) ; P6.0@104.304,80.01 116.095,80.01 U3.3 ; v1(104.304,89.535) 104.304,91.25 ; P3.4 120.395,76.672 U3.3 ; U1.3 152.15,83.82 P5.2 152.07,78.74 U1.5 145.258,78.74 142.309,75.791 140.806,74.288 125.517,74.288 124.482,75.323 C2.1 120.782,75.323 U3.3
led_tr: LED1.1 U2.58 | length 29.9
  Component Side w0.3: U2.58 116.705,90.789 119.24,93.324 144.461,93.324 LED1.1
MISO: U2.22 U6.7 | length 40.2
  Component Side w0.3: v1(99.433,83.777) 99.446,83.777 106.67,76.553 115.58,76.553 116.205,77.178 U2.22
  Bottom Layer w0.3: U6.7 84.237,88.682 86.428,88.682 90.603,84.507 98.702,84.507 v1(99.433,83.777)
MOSI: U2.23 U6.6 | length 37.1
  Component Side w0.3: v1(98.84,83.161) 99.536,82.465 100.118,82.465 106.482,76.1 115.767,76.1 116.705,77.038 U2.23
  Bottom Layer w0.3: U6.6 86.966,85.09 88.728,83.328 96.34,83.328 96.366,83.303 97.191,83.303 97.63,83.742 98.129,83.742 98.306,83.566 98.435,83.566 v1(98.84,83.161)
mpuIRQ: U2.33 U5.12 | length 21
  Component Side w0.254: U2.33 123.735,80.46 124.608,79.587 124.608,79.15 v1(125.382,78.376) ; U5.12 137.583,82.677 137.795,82.677 v1(138.178,83.059)
  Bottom Layer w0.254: v1(125.382,78.376) 125.382,78.175 126.481,77.076 132.194,77.076 v1(138.178,83.059)
NetBUZ1_1: BUZ1.1 Q2.3 | length 7.8
  Component Side w0.5: BUZ1.1 81.296,86.344 Q2.3
NetC5_2: C5.2 R11.2 U2.7 | length 7.3
  Component Side w0.3: R11.2 108.878,81.284 108.878,83.635 109.203,83.96 109.203,83.982 109.781,84.56 C5.2 110.255,84.96 U2.7
NetC9_2: C9.2 U5.10 | length 3
  Component Side w0.254: U5.10 138.178,80.655 C9.2
NetC11_2: C11.2 U5.20 | length 4.5
  Component Side w0.254: U5.20 133.12,86.423 133.12,87.285 134.405,88.57 134.939,88.57 C11.2
NetLED1_2: LED1.2 R6.1 | length 1.7
  Component Side w0.3: LED1.2 147.943,93.345 R6.1
NetLED2_K: LED2.K R7.2 | length 3.4
  Component Side w0.5: LED2.K 143.914,91.189 R7.2
NetLED3_1: LED3.1 R20.1 | length 1.5
  Bottom Layer w0.3: R20.1 102.093,72.785 LED3.1
NetLED4_1: LED4.1 R21.1 | length 1.7
  Bottom Layer w0.3: LED4.1 109.03,72.806 R21.1
NetLED5_1: LED5.1 R23.2 | length 1.3
  Component Side w0.3: LED5.1 R23.2
NetLED5_2: LED5.2 Q3.1 | length 3.9
  Component Side w0.3: Q3.1 81.08,93.912 LED5.2
NetLED6_1: LED6.1 R24.2 | length 1.5
  Component Side w0.3: LED6.1 165.092,81.43 R24.2
NetLED6_2: LED6.2 Q4.1 | length 8.9
  Component Side w0.3: Q4.1 161.773,89.489 165.092,86.17 LED6.2
NetP1_1: P1.1 S1.3 | length 6.6
  Bottom Layer w0.75: v1(99.155,80.21) 100.378,80.21 102.718,82.55 P1.1
NetP2_1: P2.1 U1.11 | length 4.3
  Bottom Layer w0.75: P2.1 129.755,90.33 U1.11
NetP2_2: P2.2 U1.9 | length 4.3
  Bottom Layer w0.75: P2.2 129.845,87.38 U1.9
NetP2_3: P2.3 U1.10 | length 2.3
  Bottom Layer w1: P2.3 130.82,88.855 U1.10
NetQ1_1: Q1.1 R6.2 | length 2
  Component Side w0.5: Q1.1 R6.2
NetQ1_3: Q1.3 R7.1 | length 2.9
  Component Side w0.5: R7.1 146.15,88.99 Q1.3
NetQ2_1: Q2.1 R22.2 | length 1.8
  Component Side w0.5: Q2.1 91.396,85.394 R22.2
NetR3_1: R3.1 U1.8 | length 15.5
  Bottom Layer w0.3: R3.1 131.513,93.482 132.667,92.327 132.667,84.093 132.395,83.82 U1.8
NetR4_1: R4.1 U1.7 | length 21
  Bottom Layer w0.3: R4.1 126.365,93.932 126.567,94.134 131.5,94.134 133.12,92.515 133.12,82.055 132.345,81.28 U1.7
NetR5_1: R5.1 U1.6 | length 26.1
  Bottom Layer w0.3: R5.1 124.93,93.932 125.585,94.587 131.688,94.587 133.572,92.702 133.572,79.755 132.557,78.74 U1.6@131.015,78.74
NetR9_1: R9.1 U2.44 | length 47.5
  Component Side w0.3: R9.1 94.845,84.914 102.54,84.914 103.46,83.994 103.46,82.377 104.339,81.498 105.785,81.498 108.497,84.21 v1(108.601,84.21) ; v1(119.43,81.065) 119.43,83.468 119.956,83.994 119.956,84.068 121.848,85.96 U2.44
  Bottom Layer w0.3: v1(108.601,84.21) 110.098,84.21 110.637,83.672 113.5,83.672 116.129,81.043 119.408,81.043 v1(119.43,81.065)
NetR10_1: R10.1 U2.45 | length 56.4
  Component Side w0.3: R10.1 82.748,77.118 82.748,75.148 83.075,74.82 86.13,74.82 87.625,76.316 86.475,76.316 86.298,76.493 86.298,77.744 93.92,85.366 102.727,85.366 104.415,83.679 105.046,83.679 106.372,85.005 v1(108.428,85.005) ; v1(118.279,81.672) 118.279,82.958 119.503,84.181 119.503,84.255 121.708,86.46 U2.45
  Bottom Layer w0.3: v1(108.428,85.005) 108.524,84.909 110.039,84.909 110.824,84.124 113.687,84.124 116.139,81.672 v1(118.279,81.672)
NetR12_2: R12.2 U2.28 | length 14.3
  Component Side w0.3: v1(107.348,74.493) 116.213,74.493 119.205,77.485 U2.28
NetR13_2: R13.2 U2.26 | length 18.7
  Component Side w0.3: v1(103.035,75.923) 103.31,75.648 116.083,75.648 118.205,77.77 U2.26
  Bottom Layer w0.3: R13.2 103.035,75.768 v1(103.035,75.923)
NetR14_2: R14.2 U4.2 | length 2.1
  Component Side w0.5: U4.2 98.291,74.493 R14.2
NetR16_1: R16.1 U2.6 X1.1 | length 8.1
  Component Side w0.3: X1.1 107.928,88.97 R16.1 108.428,87.782 110.75,85.46 U2.6
NetR16_2: R16.2 U2.5 X1.3 | length 9.2
  Component Side w0.3: X1.3 107.928,91.37 R16.2 108.913,90.87 109.22,90.563 109.22,87.63 110.89,85.96 U2.5
NetR18_2: R18.2 R19.2 U2.60 | length 3.7
  Component Side w0.3: R18.2 115.79,92.13 R19.2 ; U2.60 115.705,91.865 R19.2@115.797,91.957
NetR25_1: R25.1 U5.9 | length 4.9
  Component Side w0.254: U5.9 137.227,80.849 137.227,79.956 R25.1
nrf_irq: U2.27 U6.8 | length 42.6
  Component Side w0.3: v1(96.615,83.905) 96.615,83.553 97.63,82.537 98.824,82.537 99.349,82.012 99.93,82.012 100.107,81.835 100.107,77.999 102.786,75.32 102.998,75.32 103.123,75.195 116.275,75.195 118.705,77.625 U2.27
  Bottom Layer w0.3: U6.8 86.052,87.63 89.777,83.905 v1(96.615,83.905)
NRFCE: U2.20 U6.3 | length 37.2
  Component Side w0.3: v1(101.51,83.406) 101.51,82.992 107.044,77.457 115.205,77.457 U2.20
  Bottom Layer w0.3: U6.3 84.237,81.498 86.816,81.498 87.283,81.965 95.784,81.965 95.803,81.945 99.507,81.945 100.968,83.406 v1(101.51,83.406)
NRFCS: U2.17 U6.4 | length 31.9
  Component Side w0.3: v1(102.112,84.19) 102.112,83.084 106.821,78.376 113.64,78.376 U2.17@113.705,78.311
  Bottom Layer w0.3: U6.4 85.858,82.417 95.971,82.417 95.991,82.398 99.108,82.398 100.9,84.19 v1(102.112,84.19)
PARA: P7.2 Q3.3 R28.1 | length 11.6
  Component Side w0.5: Q3.3 82.812,91.63 R28.1
  Component Side w0.75: P7.2 76.2,86.795 78.74,89.335 78.74,91.384 79.418,92.062 Q3.3
para_tr: R23.1 U2.59 | length 33.8
  Component Side w0.3: R23.1 91.072,91.32 102.8,91.32 105.157,93.677 112.885,93.677 113.857,92.705 116.557,92.705 116.753,92.51 116.753,91.608 116.205,91.06 U2.59
RX: U2.43
SCK: U2.21 U6.5 | length 39.1
  Component Side w0.3: v1(97.88,83.14) 97.88,83.777 98.526,84.422 99.639,84.422 100.035,84.026 100.035,83.827 106.857,77.005 115.392,77.005 115.705,77.318 U2.21
  Bottom Layer w0.3: U6.5 84.469,83.806 86.164,83.806 87.094,82.875 96.153,82.875 96.178,82.85 97.59,82.85 v1(97.88,83.14)
SCL: R15.1 U2.29 U5.23 U7.4 | length 52.2
  Component Side w0.254: U5.23 132.033,85.329 132.033,87.473 135.242,90.682 136.567,90.682 140.411,86.837
  Component Side w0.3: U2.29 119.705,77.368 121.038,76.035 R15.1 123.063,76.035 125.038,74.06 134.482,74.06 135.052,74.63 U7.4 140.611,75.177 142.875,77.441 142.875,80.114 140.411,82.577 140.411,86.837
SDA: R17.1 U2.30 U5.24 U7.3 | length 51.3
  Component Side w0.254: U5.24 131.627,85.022 131.627,87.984 v1(134.62,90.977)
  Component Side w0.3: U2.30 120.205,77.508 120.878,76.835 123.64,76.835 R17.1 125.963,74.513 133.985,74.513 134.29,74.817 134.29,75.641 134.477,75.827 U7.3 140.332,75.827 142.24,77.736 142.24,80.109 139.959,82.39 139.959,86.682 136.539,90.102 v1(135.482,90.102)
  Bottom Layer w0.3: v1(134.62,90.977) 135.482,90.116 v1(135.482,90.102)
SDIO_CLK: P6.5 U2.53 | length 28.8
  Component Side w0.3: v1(118.205,86.555) 118.153,86.607 118.153,87.673 119.205,88.725 U2.53
  Bottom Layer w0.3: P6.5 98.38,91.912 100.355,93.887 104.68,93.887 112.398,86.169 117.819,86.169 v1(118.205,86.555)
SDIO_CMD: P6.3 U2.54 | length 29.9
  Component Side w0.3: v1(117.21,86.772) 117.21,87.375 118.705,88.87 U2.54
  Bottom Layer w0.3: P6.3 96.333,90.805 96.333,91.862 98.81,94.34 104.868,94.34 112.448,86.76 117.198,86.76 v1(117.21,86.772)
SDIO_D0: P6.7 U2.39 | length 29.2
  Component Side w0.3: v1(121.205,83.23) 121.435,83.46 U2.39
  Bottom Layer w0.3: P6.7 100.626,90.805 100.626,92.347 101.713,93.435 104.493,93.435 112.211,85.717 119.515,85.717 121.205,84.027 v1(121.205,83.23)
SDIO_D1: P6.8 U2.40 | length 27.6
  Component Side w0.3: v1(120.56,83.82) 120.7,83.96 U2.40
  Bottom Layer w0.3: P6.8 101.54,90.945 101.54,92.277 102.245,92.982 104.306,92.982 112.095,85.193 113.98,85.193 115.955,83.218 119.957,83.218 v1(120.56,83.82)
SDIO_D2: P6.1 U2.51 | length 34.5
  Component Side w0.3: v1(119.643,87.331) 120.205,87.893 U2.51
  Bottom Layer w0.3: P6.1 93.98,92.417 96.813,95.25 105.675,95.25 112.105,88.82 113.035,88.82 114.113,87.742 116.53,87.742 116.686,87.898 119.077,87.898 v1(119.643,87.331)
SDIO_D3: P6.2 U2.52 | length 32.4
  Component Side w0.3: v1(118.827,87.295) 118.827,87.367 119.705,88.245 U2.52
  Bottom Layer w0.3: P6.2 95.08,92.417 97.455,94.792 105.055,94.792 112.635,87.212 116.64,87.212 116.802,87.374 118.748,87.374 v1(118.827,87.295)
SWCLK: P3.3 U2.49 | length 13.1
  Component Side w0.3: U2.49 123.942,89.76 125.57,88.132 125.57,81.983 P3.3
SWDIO: P3.2 U2.46 | length 11
  Component Side w0.3: U2.46 123.895,86.96 125,85.854 125,81.064 126.908,79.157 P3.2
TX: U2.42
USB_D+: P4.3 R8.1 R10.2 | length 4.3
  Component Side w0.3: R8.1 83.5,75.773 R10.2 83.82,77.438 v1(83.82,78.343)
  Bottom Layer w0.3: v1(83.82,78.343) 84.15,78.013 P4.3
USB_D-: P4.2 R9.2 | length 2.7
  Component Side w0.3: v1(85.15,78.326) 85.15,77.418 R9.2
  Bottom Layer w0.3: P4.2 84.8,77.976 v1(85.15,78.326)
pads on no net: LED2.t-pad P4.4 P6. S1.1 S1.4 S1.5 S1.6 U2.2 U2.3 U2.4 U2.9 U2.10 U2.11 U2.14 U2.15 U2.24 U2.25 U2.36 U2.37 U2.38 U2.41 U2.50 U2.55 U5.2 U5.3 U5.4 U5.5 U5.6 U5.7 U5.14 U5.15 U5.16 U5.17 U5.19 U5.21 U5.22 U7.1 U7.2
copper on no net:
  other v1: 160.245,76.15

## Other copper
Component Side:
  text "Ivannik D" at 89.941,92.612 h4.5
  text "Hryshko I" at 147.031,72.48 h4.5

## Silkscreen, mask and mechanical layers (free items; w line width, h text height)
Top Overlay:
  lines w0.2: 72.39,83.82 171.45,83.82
Mechanical 2:
  the board outline again, w0.254

## Text inside footprints (layer, text, board x,y; h text height)
BUZ1: Top Overlay "+" at 79.31,77.17 h1.52 r270